# EAGLE board FiberLEDPanel (EAGLE 9.0.1)
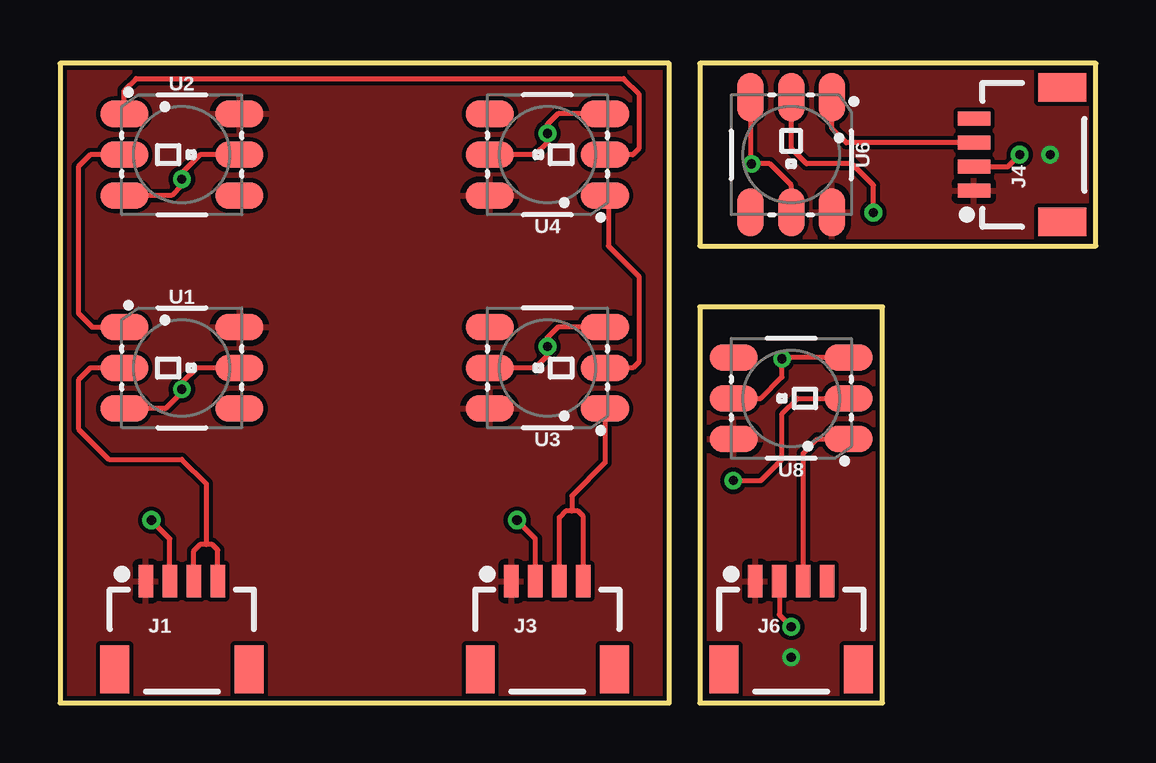
[diagram p0: board, top side]
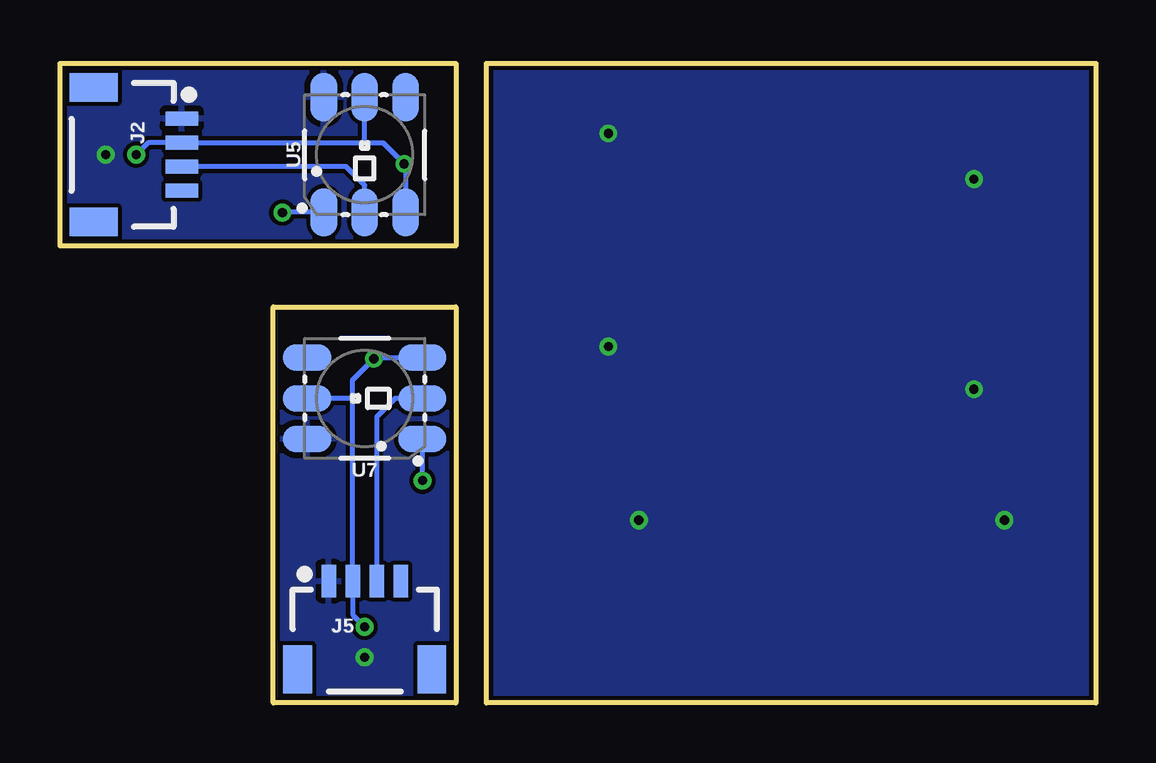
[diagram p1: board, bottom side, seen from below]

Size 43.18 x 26.67 mm. Coordinates in mm from the lower left corner, seen from the top.
Outline: 0,0 25.4,0 25.4,26.67 0,26.67 0,0
Outline: 43.18,26.67 26.67,26.67 26.67,19.05 43.18,19.05 43.18,26.67
Outline: 34.29,0 34.29,16.51 26.67,16.51 26.67,0 34.29,0
Copper layers (1*16): Top 0.035mm / dielectric 1.5mm / Bottom 0.035mm
Design rules "SparkFun-2-layer-TIGHT": minimum track width 7mil, minimum drill 15mil, track to track 7mil, track to pad 7mil, pad to pad 7mil, via to via 7mil, smd to smd 7mil, copper to edge 7mil, drill to drill 7mil, minimum pad ring 7mil, minimum via ring 7mil, stop-mask expansion 4mil, vias tented up to drill 25mil, thermal gap 10mil

## Footprints (pad centres in the part's own frame; a part is rotated, then mirrored left to right if it is on the bottom)
1X04_1MM_RA = smd 0.6 x 1.35: 1 -1.5,0; 2 -0.5,0; 3 0.5,0; 4 1.5,0 | smd 1.2 x 2: NC1 2.8,-3.675; NC2 -2.8,-3.675
LED-TRICOLOR-5050-IC = smd 2 x 1.1: 1 -2.4,1.7; 2 -2.4,0; 3 -2.4,-1.7; 4 2.4,-1.7; 5 2.4,0; 6 2.4,1.7

## Placement (x,y rotation side)
FRAME1  FRAME-LETTER  [CREATIVE_COMMONS]  -80.01,1.27 0 top  (outside the outline)
FRAME2  FRAME-LETTER  [CREATIVE_COMMONS]  -80.01,30.48 0 top  (outside the outline)
J1  [1X04_1MM_RA]  5.08,5.08 0 top
J2  [1X04_1MM_RA]  38.1,22.86 270 bottom
J3  [1X04_1MM_RA]  20.32,5.08 0 top
J4  [1X04_1MM_RA]  38.1,22.86 90 top
J5  [1X04_1MM_RA]  30.48,5.08 0 bottom
J6  [1X04_1MM_RA]  30.48,5.08 0 top
U1  WS2812  [LED-TRICOLOR-5050-IC]  5.08,13.97 0 top
U2  WS2812  [LED-TRICOLOR-5050-IC]  5.08,22.86 0 top
U3  WS2812  [LED-TRICOLOR-5050-IC]  20.32,13.97 180 top
U4  WS2812  [LED-TRICOLOR-5050-IC]  20.32,22.86 180 top
U5  WS2812  [LED-TRICOLOR-5050-IC]  30.48,22.86 90 bottom
U6  WS2812  [LED-TRICOLOR-5050-IC]  30.48,22.86 270 top
U7  WS2812  [LED-TRICOLOR-5050-IC]  30.48,12.7 180 bottom
U8  WS2812  [LED-TRICOLOR-5050-IC]  30.48,12.7 180 top

## Library data of the parts
FRAME1 FRAME2 = SparkFun-Aesthetics
J1-J6 = SparkFun-Connectors; PROD_ID: CONN-13694
U1-U8 = SparkFun-LED; PROD_ID: DIO-11598

## Nets
5V: J1.2 J3.2 U1.3 U1.5 U2.3 U2.5 U3.3 U3.5 U4.3 U4.5
5V1: J2.2 J4.2 U5.3 U5.5 U6.3 U6.5
5V2: J5.2 J6.2 U7.3 U7.5 U8.3 U8.5
GND: J1.1 J3.1 U1.6 U2.6 U3.6 U4.6
GND1: J2.1 J4.1 U5.6 U6.6
GND2: J5.1 J6.1 U7.6 U8.6
N$1: J1.3 J1.4 U1.2
N$2: U3.2 U4.1
N$3: U2.1 U4.2
N$4: J3.3 J3.4 U3.1
N$5: U1.1 U2.2
N$6: U5.1 U6.2
N$7: J2.3 U5.2
N$8: J4.3 U6.1
N$9: U7.1 U8.2
N$10: J5.3 U7.2
N$11: J6.3 U8.1

## Tracks (layer width: path | path; a pad name or v marks a point on that pad's centre or on a via)
5V  (via drill 0.38, 0.4)
  Top 0.203: U2.5 5.84,22.86 5.08,22.1 v5.08,21.84 5.08,21.59 4.65,21.16 U2.3 | U1.5 5.71,13.97 5.08,13.34 v5.08,13.08 5.08,12.95 4.4,12.27 U1.3 | U3.3 20.75,15.67 20.32,15.24 v20.32,14.86 20.32,14.48 19.81,13.97 U3.5 | U4.3 20.75,24.56 20.32,24.13 v20.32,23.75 20.32,23.37 19.81,22.86 U4.5 | J1.2 4.58,6.85 v3.81,7.62 | J3.2 19.82,6.85 v19.05,7.62
  pour Bottom: 25.4,0 0,0 0,26.67 25.4,26.67
5V1  (via drill 0.38)
  Top 0.203: J4.2 39.51,22.36 v40.01,22.86 | U6.3 28.78,22.53 v28.83,22.48 29.59,22.48 30.48,21.59 U6.5
  Bottom 0.203: v40.01,22.86 39.51,23.36 J2.2 30.48,23.36 | U5.3 28.78,22.43 v28.83,22.48 29.71,23.36 30.48,23.36 | 30.48,23.36 U5.5
5V2  (via drill 0.38)
  Top 0.203: J6.2 29.98,3.67 v30.48,3.17 | U8.3 30.15,14.4 v30.1,14.35 30.1,13.59 29.21,12.7 U8.5
  Bottom 0.203: v30.48,3.17 30.98,3.67 J5.2 30.98,12.7 | U7.3 30.05,14.4 v30.1,14.35 30.98,13.47 30.98,12.7 | 30.98,12.7 U7.5
GND
  pour Top: 0,0 25.4,0 25.4,26.67 0,26.67
GND1  (via drill 0.38)
  other vias: 41.27,22.86
  pour Bottom: 26.67,26.67 43.18,26.67 43.18,19.05 26.67,19.05
  pour Top: 43.18,26.67 26.67,26.67 26.67,19.05 43.18,19.05
GND2  (via drill 0.38)
  other vias: 30.48,1.91
  pour Bottom: 34.29,16.51 34.29,0 26.67,0 26.67,16.51
  pour Top: 34.29,0 34.29,16.51 26.67,16.51 26.67,0
N$1
  Top 0.203: J1.3 5.58,6.34 5.84,6.6 6.1,6.6 | J1.4 6.58,6.37 6.35,6.6 6.1,6.6 | U1.2 1.27,13.97 0.76,13.46 0.76,11.43 2.03,10.16 5.08,10.16 6.1,9.14 6.1,6.6
N$2
  Top 0.203: U4.1 22.86,21.02 22.86,19.05 24.13,17.78 24.13,14.22 23.88,13.97 U3.2
N$3
  Top 0.203: U2.1 2.68,25.54 3.17,26.04 23.5,26.04 24.13,25.4 24.13,23.11 23.88,22.86 U4.2
N$4
  Top 0.203: J3.3 20.82,7.74 21.08,8 21.34,8 | J3.4 21.82,7.77 21.59,8 21.34,8 | U3.1 22.72,10.02 21.34,8.64 21.34,8
N$5
  Top 0.203: U2.2 1.27,22.86 0.76,22.35 0.76,16.26 1.35,15.67 U1.1
N$6  (via drill 0.38)
  Top 0.203: v33.91,20.45 33.91,21.59 33.02,22.48 31.11,22.48 30.48,23.11 U6.2
  Bottom 0.203: U5.1 33.9,20.46 v33.91,20.45
N$7
  Bottom 0.203: U5.2 30.48,21.59 31.25,22.36 J2.3
N$8
  Top 0.203: J4.3 32.77,23.36 32.18,23.95 U6.1
N$9  (via drill 0.38)
  Top 0.203: v28.07,9.27 29.21,9.27 30.1,10.16 30.1,12.06 30.73,12.7 U8.2
  Bottom 0.203: U7.1 28.08,9.28 v28.07,9.27
N$10
  Bottom 0.203: U7.2 29.21,12.7 29.98,11.93 J5.3
N$11
  Top 0.203: J6.3 30.98,10.41 31.57,11 U8.1